# EAGLE board DIA02-03 (EAGLE 9.7.0)

Size 147.07 x 130.53 mm. Coordinates in mm from the lower left corner, seen from the top.
Outline: 0,0 147.07,0 147.07,130.53 0,130.53 0,0
Copper layers (1*16): Top 0.035mm / dielectric 1.5mm / Bottom 0.035mm
Design rules "default": minimum track width 6mil, minimum drill 0.35mm, track to track 6mil, track to pad 6mil, pad to pad 6mil, via to via 6mil, smd to smd 6mil, copper to edge 40mil, drill to drill 6mil, minimum pad ring 10mil, minimum via ring 8mil, stop-mask expansion 4mil, vias tented up to drill 0mil, thermal gap 10mil

## Footprints (pad centres in the part's own frame; a part is rotated, then mirrored left to right if it is on the bottom)
1X08 = drill 1.016 long: 1 -8.89,0; 2 -6.35,0; 3 -3.81,0; 4 -1.27,0; 5 1.27,0; 6 3.81,0; 7 6.35,0; 8 8.89,0
RESAD1016W63L850D250B = drill 0.83 pad 1.43: 1 -5.08,0; 2 5.08,0
SG90 = drill 1.016 long: 1 -2.54,0; 2 0,0; 3 2.54,0
JHD-162A = drill 1.016 long: 1 -19.05,0; 2 -16.51,0; 3 -13.97,0; 4 -11.43,0; 5 -8.89,0; 6 -6.35,0; 7 -3.81,0; 8 -1.27,0; 9 1.27,0; 10 3.81,0; 11 6.35,0; 12 8.89,0; 13 11.43,0; 14 13.97,0; 15 16.51,0; 16 19.05,0
ARDUINO-UNO-R3-SHIELD = drill 1.016 pad 1.88: 3.3V 24.13,-2.54; 5V 24.13,0; A0 24.13,12.7; A1 24.13,15.24; A2 24.13,17.78; A3 24.13,20.32; A4 24.13,22.86; A5 24.13,25.4; AREF -24.13,-13.97; D2 -24.13,20.32; D3 -24.13,17.78; D4 -24.13,15.24; D5 -24.13,12.7; D6 -24.13,10.16; D7 -24.13,7.62; D8 -24.13,3.81; D9 -24.13,1.27; D10 -24.13,-1.27; D11 -24.13,-3.81; D12 -24.13,-6.35; D13 -24.13,-8.89; GND@0 24.13,2.54; GND@1 24.13,5.08; GND@2 -24.13,-11.43; IOREF 24.13,-7.62; NC 24.13,-10.16; RES 24.13,-5.08; RX -24.13,25.4; SCL -24.13,-19.05; SDA -24.13,-16.51; TX -24.13,22.86; VIN 24.13,7.62

## Placement (x,y rotation side)
KEYPADKEYS  KEYPAD-4X4  [1X08]  119.62,85.49 0 top
R1  220  [RESAD1016W63L850D250B]  110.49,44.12 90 top
R2  220  [RESAD1016W63L850D250B]  77.47,44.12 90 top
R3  220  [RESAD1016W63L850D250B]  72.39,44.12 90 top
SERVOSERVO  SERVOSG90  [SG90]  126.27,66.57 90 top
ULCD  LCD-16X2JHD-162A  [JHD-162A]  91.44,36.63 0 top
UUNO  ARDUINO-UNO-R3-SHIELD  [ARDUINO-UNO-R3-SHIELD]  29.84,82.65 180 top

## Library data of the parts
KEYPADKEYS R1-R3 SERVOSERVO ULCD UUNO = Tinkercad

## Nets
ULCD_GND: R3.1 ULCD.1
ULCD_LED-: R1.1 ULCD.16
ULCD_VO: R2.1 ULCD.3
UUNO_5V: SERVOSERVO.2 ULCD.2 ULCD.15 UUNO.5V
UUNO_A0: KEYPADKEYS.1 UUNO.A0
UUNO_A1: KEYPADKEYS.2 UUNO.A1
UUNO_A2: KEYPADKEYS.3 UUNO.A2
UUNO_A3: KEYPADKEYS.4 UUNO.A3
UUNO_A4: KEYPADKEYS.5 UUNO.A4
UUNO_A5: KEYPADKEYS.6 UUNO.A5
UUNO_D2: ULCD.14 UUNO.D2
UUNO_D3: ULCD.13 UUNO.D3
UUNO_D4: ULCD.12 UUNO.D4
UUNO_D5: ULCD.11 UUNO.D5
UUNO_D6: ULCD.6 UUNO.D6
UUNO_D7: ULCD.4 UUNO.D7
UUNO_D8: KEYPADKEYS.7 UUNO.D8
UUNO_D9: KEYPADKEYS.8 UUNO.D9
UUNO_D10: SERVOSERVO.3 UUNO.D10
UUNO_GND: R1.2 R2.2 R3.2 SERVOSERVO.1 ULCD.5 UUNO.GND@0 UUNO.GND@1 UUNO.GND@2

## Tracks (layer width: path | path; a pad name or v marks a point on that pad's centre or on a via)
ULCD_GND  (1 unrouted)
ULCD_LED-  (1 unrouted)
ULCD_VO  (1 unrouted)
UUNO_5V  (3 unrouted)
UUNO_A0  (1 unrouted)
UUNO_A1  (1 unrouted)
UUNO_A2  (1 unrouted)
UUNO_A3  (1 unrouted)
UUNO_A4  (1 unrouted)
UUNO_A5  (1 unrouted)
UUNO_D2  (1 unrouted)
UUNO_D3  (1 unrouted)
UUNO_D4  (1 unrouted)
UUNO_D5  (1 unrouted)
UUNO_D6  (1 unrouted)
UUNO_D7  (1 unrouted)
UUNO_D8  (1 unrouted)
UUNO_D9  (1 unrouted)
UUNO_D10  (1 unrouted)
UUNO_GND  (7 unrouted)